# EAGLE board 1-Axis_Board_-_Camera_Gantry (EAGLE 6.4)
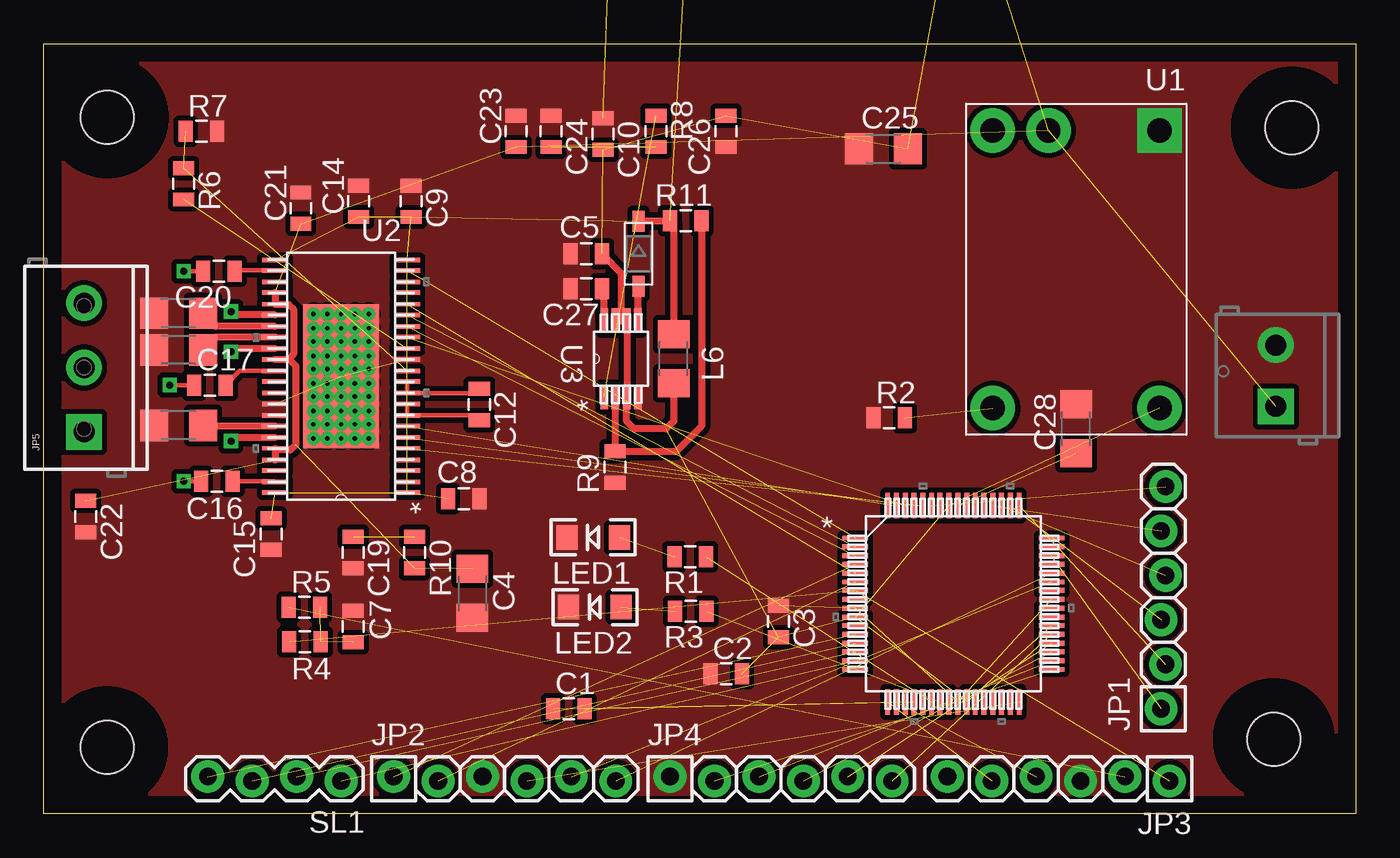
[diagram p0: board, top side]
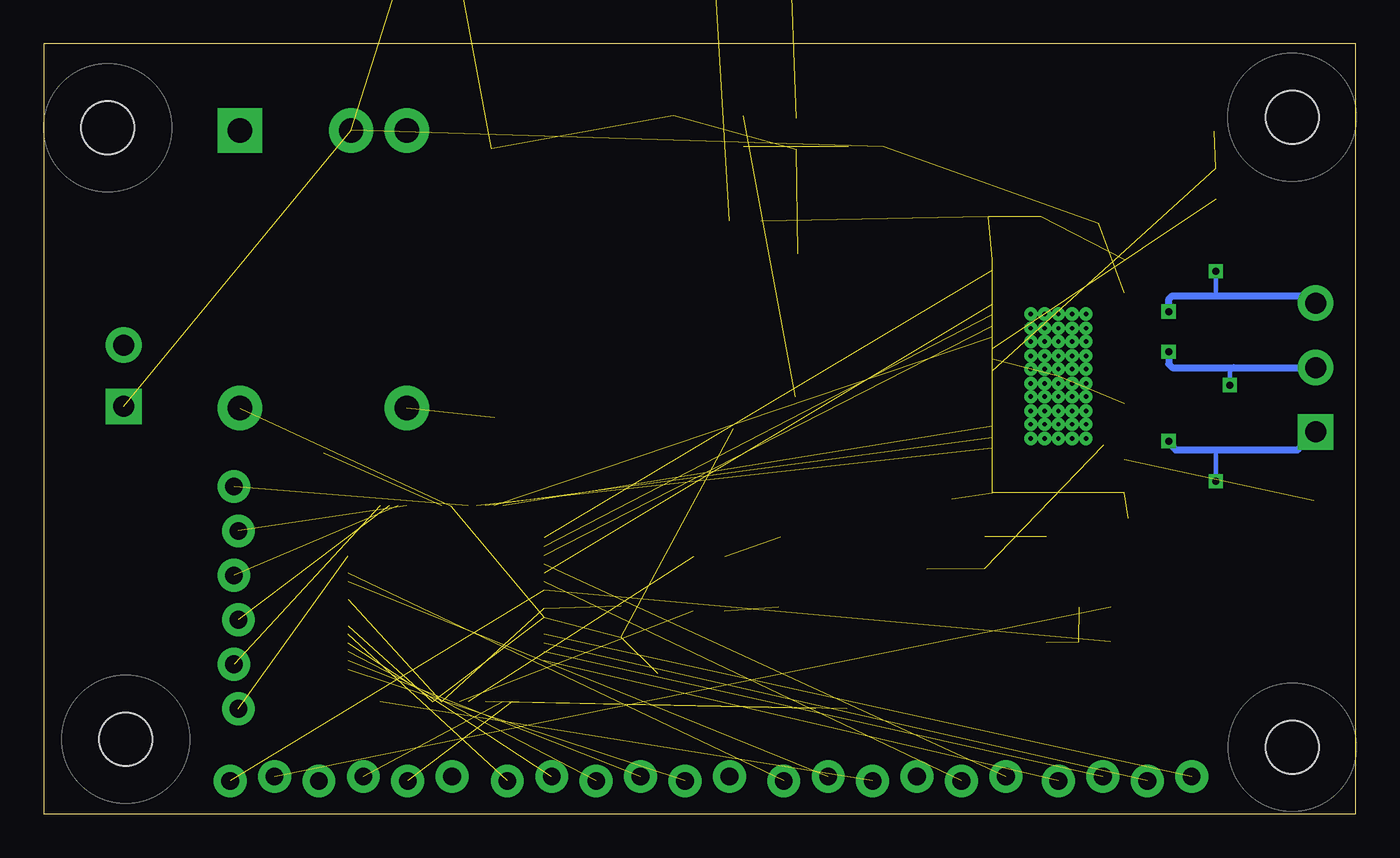
[diagram p1: board, bottom side, seen from below]

Size 75 x 44 mm. Coordinates in mm from the lower left corner, seen from the top.
Outline: 0,0 0,44 75,44 75,0 0,0
Copper layers (1*16): Top 0.035mm / dielectric 1.5mm / Bottom 0.035mm
Design rules "default": minimum track width 10mil, minimum drill 24mil, track to track 8mil, track to pad 8mil, pad to pad 8mil, via to via 8mil, smd to smd 8mil, copper to edge 40mil, drill to drill 8mil, minimum pad ring 10mil, minimum via ring 8mil, stop-mask expansion 4mil, vias tented up to drill 0mil, thermal gap 10mil
Net classes: 0 default: width 0.406 mm; 1 power: width 0.762 mm, clearance 0.254 mm to class 0, clearance 0.508 mm; 2 small: width 0.254 mm, clearance 0.254 mm to class 1

## Footprints (pad centres in the part's own frame; a part is rotated, then mirrored left to right if it is on the bottom)
0805 = smd 0.8 x 1.2: 1 -0.9,0; 2 0.9,0
1206 = smd 1.6 x 1.8: 1 -1.4,0; 2 1.4,0
CPOL-RADIAL-100UF-25V = drill 0.7 pad 1.651 square: 1 1.27,0 | drill 0.7 pad 1.651: 2 -1.27,0
CPOL-RADIAL-1000UF-25V = drill 0.7 pad 1.651 square: 1 2.54,0 | drill 0.7 pad 1.651: 2 -2.54,0
SOD-123 = smd 1.2 x 0.7: A 1.85,0; C -1.85,0
STAND-OFF-TIGHT = hole 3.048: 0,0
SCREWTERMINAL-3.5MM-2-NS = drill 1.2 pad 2.032 square: 1 0,0 | drill 1.2 pad 2.032: 2 3.5,0
1X06_LOCK = drill 1.016 pad 1.88: 1 0,0.127; 2 2.54,-0.127; 3 5.08,0.127; 4 7.62,-0.127; 5 10.16,0.127; 6 12.7,-0.127
SCREWTERMINAL-3.5MM-3_LOCK.007S = drill 1.2 pad 2.032 square: 1 -0.178,0 | drill 1.2 pad 2.032: 2 3.5,0; 3 7.178,0
LED-1206 = smd 1.2 x 1.4: A -1.5,0; C 1.5,0
1X04_LOCK = drill 1.016 pad 1.88: 1 0,0.127; 2 2.54,-0.127; 3 5.08,0.127; 4 7.62,-0.127
PTN78000 = drill 1.397 pad 2.54: ADJ 15.875,-9.525; INHIBIT 0,-9.525; V_IN 0,-6.35; V_OUT 15.875,0 | drill 1.397 pad 2.54 square: GND 0,0
DDW44_8P26X4P31 = smd 1.473 x 0.254: 1 -3.785,6.655; 2 -3.785,6.045; 3 -3.785,5.385; 4 -3.785,4.775; 5 -3.785,4.115; 6 -3.785,3.505; 7 -3.785,2.845; 8 -3.785,2.235; 9 -3.785,1.575; 10 -3.785,0.965; 11 -3.785,0.305; 12 -3.785,-0.305; 13 -3.785,-0.965; 14 -3.785,-1.575; 15 -3.785,-2.235; 16 -3.785,-2.845; 17 -3.785,-3.505; 18 -3.785,-4.115; 19 -3.785,-4.775; 20 -3.785,-5.385; 21 -3.785,-6.045; 22 -3.785,-6.655; 23 3.785,-6.655; 24 3.785,-6.045; 25 3.785,-5.385; 26 3.785,-4.775; 27 3.785,-4.115; 28 3.785,-3.505; 29 3.785,-2.845; 30 3.785,-2.235; 31 3.785,-1.575; 32 3.785,-0.965; 33 3.785,-0.305; 34 3.785,0.305; 35 3.785,0.965; 36 3.785,1.575; 37 3.785,2.235; 38 3.785,2.845; 39 3.785,3.505; 40 3.785,4.115; 41 3.785,4.775; 42 3.785,5.385; 43 3.785,6.045; 44 3.785,6.655 | smd 4.318 x 8.255: EPAD 0,0 | drill 0.254: V 1.575,3.556; V_2 -1.575,-2.743; V_3 -1.575,-3.556; V_4 -1.575,-1.981; V_5 -1.575,-1.168; V_6 -1.575,-0.406; V_7 -1.575,0.406; V_8 -1.575,1.168; V_9 -1.575,1.981; V_10 -1.575,2.743; V_11 -1.575,3.556; V_12 -0.787,-3.556; V_13 -0.787,-2.743; V_14 -0.787,-1.981; V_15 -0.787,-1.168; V_16 -0.787,-0.406; V_17 -0.787,0.406; V_18 -0.787,1.168; V_19 -0.787,1.981; V_20 -0.787,2.743; V_21 -0.787,3.556; V_22 0,-3.556; V_23 0,-2.743; V_24 0,-1.981; V_25 0,-1.168; V_26 0,-0.406; V_27 0,0.406; V_28 0,1.168; V_29 0,1.981; V_30 0,2.743; V_31 0,3.556; V_32 0.787,-3.556; V_33 0.787,-2.743; V_34 0.787,-1.981; V_35 0.787,-1.168; V_36 0.787,-0.406; V_37 0.787,0.406; V_38 0.787,1.168; V_39 0.787,1.981; V_40 0.787,2.743; V_41 0.787,3.556; V_42 1.575,-3.556; V_43 1.575,-2.743; V_44 1.575,-1.981; V_45 1.575,-1.168; V_46 1.575,-0.406; V_47 1.575,0.406; V_48 1.575,1.168; V_49 1.575,1.981; V_50 1.575,2.743
DGK8 = smd 1.422 x 0.432: 1 -2.184,0.965; 2 -2.184,0.33; 3 -2.184,-0.33; 4 -2.184,-0.965; 5 2.184,-0.965; 6 2.184,-0.33; 7 2.184,0.33; 8 2.184,0.965
QFP64-10X10MC = smd 1.473 x 0.279: 1 -5.613,3.759; 2 -5.613,3.251; 3 -5.613,2.743; 4 -5.613,2.261; 5 -5.613,1.753; 6 -5.613,1.245; 7 -5.613,0.762; 8 -5.613,0.254; 9 -5.613,-0.254; 10 -5.613,-0.762; 11 -5.613,-1.245; 12 -5.613,-1.753; 13 -5.613,-2.261; 14 -5.613,-2.743; 15 -5.613,-3.251; 16 -5.613,-3.759; 33 5.613,-3.759; 34 5.613,-3.251; 35 5.613,-2.743; 36 5.613,-2.261; 37 5.613,-1.753; 38 5.613,-1.245; 39 5.613,-0.762; 40 5.613,-0.254; 41 5.613,0.254; 42 5.613,0.762; 43 5.613,1.245; 44 5.613,1.753; 45 5.613,2.261; 46 5.613,2.743; 47 5.613,3.251; 48 5.613,3.759 | smd 0.279 x 1.473: 17 -3.759,-5.613; 18 -3.251,-5.613; 19 -2.743,-5.613; 20 -2.261,-5.613; 21 -1.753,-5.613; 22 -1.245,-5.613; 23 -0.762,-5.613; 24 -0.254,-5.613; 25 0.254,-5.613; 26 0.762,-5.613; 27 1.245,-5.613; 28 1.753,-5.613; 29 2.261,-5.613; 30 2.743,-5.613; 31 3.251,-5.613; 32 3.759,-5.613; 49 3.759,5.613; 50 3.251,5.613; 51 2.743,5.613; 52 2.261,5.613; 53 1.753,5.613; 54 1.245,5.613; 55 0.762,5.613; 56 0.254,5.613; 57 -0.254,5.613; 58 -0.762,5.613; 59 -1.245,5.613; 60 -1.753,5.613; 61 -2.261,5.613; 62 -2.743,5.613; 63 -3.251,5.613; 64 -3.759,5.613

## Placement (x,y rotation side)
C1  .1uF  [0805]  30,6 0 top
C2  .1uF  [0805]  39,8 0 top
C3  .1uF  [0805]  42,11 270 top
C4  2.2uF  [1206]  24.51,12.59 270 top
C5  .1uF  [0805]  31,32 180 top
C6  100uF  [CPOL-RADIAL-100UF-25V]  55.92,79.97 0 top  (outside the outline)
C7  .1uF  [0805]  17.69,10.7 90 top
C8  1uF  [0805]  24,18 180 top
C9  1uF  [0805]  21,35 270 top
C10  .1uF  [0805]  31.96,38.84 270 top
C11  330uF  [CPOL-RADIAL-1000UF-25V]  36,80 0 top  (outside the outline)
C12  100nF  [0805]  24.9,23.4 270 top
C13  47uF  [CPOL-RADIAL-1000UF-25V]  25,80 0 top  (outside the outline)
C14  1uF  [0805]  18,35 90 top
C15  1uF  [0805]  13,16 270 top
C16  .1uF  [0805]  9.9,19 0 top
C17  .1uF  [0805]  9.5,24.5 0 top
C18  1000uF  [CPOL-RADIAL-1000UF-25V]  46.96,79.98 180 top  (outside the outline)
C19  10nF  [0805]  17.67,14.92 270 top
C20  .1uF  [0805]  10,31 180 top
C21  .1uF  [0805]  14.7,34.6 90 top
C22  .1uF  [0805]  2.4,17 270 top
C23  .1uF  [0805]  27,39 90 top
C24  1.6nF  [0805]  29,39 270 top
C25  10uF 16V  [1206]  48,38 0 top
C26  1uF 16V  [0805]  39,39 270 top
C27  .1uF  [0805]  31,30 180 top
C28  10uF  [1206]  59,22 90 top
D5  PMEG2010AEH  [SOD-123]  34,32 270 top
E$1  [STAND-OFF-TIGHT]  71.34,39.2 0 top
E$2  [STAND-OFF-TIGHT]  70.32,4.26 0 top
E$3  [STAND-OFF-TIGHT]  3.62,3.8 0 top
E$4  [STAND-OFF-TIGHT]  3.64,39.8 0 top
J1  [SCREWTERMINAL-3.5MM-2-NS]  70.43,23.28 90 top
JP1  [1X06_LOCK]  64,6 90 top
JP2  [1X06_LOCK]  20,2 0 top
JP3  [1X06_LOCK]  64.35,2 180 top
JP4  [1X06_LOCK]  35.8,2 0 top
JP5  M03SCREW_LOCK  [SCREWTERMINAL-3.5MM-3_LOCK.007S]  2.3,22 90 top
L6  LQM31PN3R3M00L  [1206]  36,26 90 top
LED1  [LED-1206]  31.4,15.8 180 top
LED2  [LED-1206]  31.51,11.81 180 top
R1  330  [0805]  36.96,14.7 180 top
R2  383 - 242  [0805]  48.33,22.62 0 top
R3  330  [0805]  36.98,11.58 180 top
R4  470  [0805]  14.92,9.84 0 top
R5  10k  [0805]  14.9,11.8 0 top
R6  OC_ADJ  [0805]  8,36 270 top
R7  1  [0805]  9,39 0 top
R8  47k  [0805]  35,39 270 top
R9  18.2k  [0805]  32.65,19.82 270 top
R10  3.3Ohm  [0805]  21.2,14.93 270 top
R11  158k  [0805]  36.7,33.9 0 top
SL1  [1X04_LOCK]  17,2 180 top
U1  PTN78000  [PTN78000]  63.78,39.05 270 top
U2  DRV8312_DDW_44  [DDW44_8P26X4P31]  17,25 180 top
U3  TPS61085_DGK_8  [DGK8]  33,26 90 top
U$1  DSPIC33EP256MC506  [QFP64-10X10MC]  52,12 0 top
U$2  ERJ-8BWJR010V  [1206]  7.7,22.2 180 top
U$3  ERJ-8BWJR010V  [1206]  7.7,28.6 180 top
U$4  ERJ-8BWJR010V  [1206]  7.7,26.5 180 top

## Library data of the parts
C1-C3 C5-C28 E$1-E$4 J1 JP1 JP2 JP4 JP5 R6-R11 SL1 U1 = ASL
C4 JP3 R1-R5 = CMPE118lib
D5 L6 U$1-U$4 = DRV83x2Support
LED1 LED2 = CMPE118lib; COLOR: red
U2 = DRV83x2Support; DATASHEETURL: http://www.ti.com/lit/gpn/DRV8312; DESCRIPTION: 6.5A Three Phase Brushless DC Motor Driver with Inrush Protection (PWM Ctrl); FAMILY_NAME: 3-PHASE BRUSHLESS DRIVER; GENERIC_PART_NUMBER: DRV8312; INDUSTRY_STD_PKG_TYPE: HTSSOP; MANUFACTURER: Texas Instruments; MANUFACTURER_PART_NUMBER: drv8312_ddw_44; PACKAGE_DESIGNATOR: DDW; PIN_COUNT: 44; VENDOR: Texas Instruments
U3 = DRV83x2Support; DATASHEETURL: http://www.ti.com/lit/gpn/TPS61085; DESCRIPTION: 18.5V, 2A, 650kHz / 1.2MHz Step-Up DC-DC Converter w/ Forced PWM Mode; FAMILY_NAME: STEP-UP REGULATOR; GENERIC_PART_NUMBER: TPS61085; INDUSTRY_STD_PKG_TYPE: MSOP; MANUFACTURER: Texas Instruments; MANUFACTURER_PART_NUMBER: tps61085_dgk_8; PACKAGE_DESIGNATOR: DGK; PIN_COUNT: 8; VENDOR: Texas Instruments

## Nets
FAULT: U2.18 U$1.5
GND: C2.1 C3.1 C4.2 C5.2 C6.2 C7.2 C8.1 C9.1 C10.1 C11.2 C13.2 C14.2 C15.2 C18.2 C19.2 C21.2 C22.2 C23.2 C24.1 C25.1 C26.2 C27.2 C28.2 J1.2 JP2.3 JP3.3 JP4.1 LED1.C LED2.C R2.1 R7.2 R9.2 U1.GND U2.13 U2.36 U2.37 U2.EPAD U3.4 U$1.9 U$1.25 U$1.41 U$2.2 U$3.2 U$4.2
GVDD: C8.2 C9.2 C11.1 C13.1 C14.1 C15.1 D5.C L6.2 R11.1 U2.1 U2.2 U2.22 U2.23 U2.44
LED1: R1.1 U$1.22
LED2: R3.1 U$1.23
MCLR: JP3.1 R4.1 U$1.7
N$1: LED1.A R1.2
N$2: C7.1 R4.2 R5.2
N$3: LED2.A R3.2
N$4: U2.38 U$2.1
N$5: U2.29 U$3.1
N$6 [power]: R2.2 U1.ADJ
N$7: U2.30 U$4.1
N$8: C1.1 U$1.19
N$9: C1.2 U$1.20
N$10: C27.1 U3.8
N$11: R8.1 U3.1
N$12: C24.2 R8.2
N$13: C19.1 R10.1
N$14: C28.1 U$1.56
N$15: D5.A U3.5
N$16: R9.1 R11.2 U3.2
N$17: JP2.1 U$1.4
N$19: JP2.4 U$1.32
N$20: JP2.5 U$1.43
N$21: C16.2 U2.43
N$22: JP2.6 U$1.44
N$23: JP1.1 U$1.46
N$24: JP1.2 U$1.49
N$25: JP1.3 U$1.50
N$27: JP1.5 U$1.52
N$28: JP1.6 U$1.59
N$29: JP2.2 U$1.6
N$30: C17.2 U2.33
N$32: JP1.4 U$1.51
N$35: JP4.4 U$1.35
N$36: JP4.5 U$1.36
N$37: JP4.6 U$1.37
N$38: JP4.3 U$1.34
N$39: C20.1 U2.24
N$40: SL1.1 U$1.15
N$41: SL1.2 U$1.14
N$42: SL1.3 U$1.13
N$43: SL1.4 U$1.12
N$44: JP4.2 U$1.33
N$45: C12.2 R6.1 R7.1 U2.8 U2.9 U2.12
N$47: C12.1 U2.10 U2.11
OC_ADJ: R6.2 U2.14
OTW: U2.21 U$1.1
OUT_A: C20.2 JP5.3 U2.28
OUT_B: C17.1 JP5.2 U2.31
OUT_C: C16.1 JP5.1 U2.39
PGC: JP3.5 U$1.17
PGD [small]: JP3.4 U$1.18
PVDD [power]: C4.1 C18.1 C21.1 C22.1 C23.1 J1.1 R10.2 U1.V_IN U2.26 U2.27 U2.32 U2.40 U2.41
PWM_A: U2.17 U$1.2
PWM_B: U2.15 U$1.62
PWM_C: U2.5 U$1.60
RESET_A: U2.16 U$1.3
RESET_B: U2.7 U$1.63
RESET_C: U2.6 U$1.61
VCC: C2.2 C3.2 C5.1 C6.1 C10.2 C25.2 C26.1 L6.1 U1.V_OUT U3.3 U3.6 U3.7 U$1.10 U$1.26 U$1.38 U$1.57
VCC3V3: JP3.2 R5.1

## Tracks (layer width: path | path; a pad name or v marks a point on that pad's centre or on a via)
FAULT  (1 unrouted)
GND  (9 unrouted)
  pour Top (isolate 0.305, no thermals): 0,44 75,44 75,0 0,0
GVDD  (11 unrouted)
  Top 0.406: D5.C 35.75,33.85 R11.1 36,33.7 L6.2
LED1  (1 unrouted)
LED2  (1 unrouted)
MCLR  (2 unrouted)
N$1  (1 unrouted)
N$2  (2 unrouted)
N$3  (1 unrouted)
N$4
  Top 0.406: U2.38 9.14,22.16 U$2.1
N$5
  Top 0.406: U2.29 9.86,27.84 U$3.1
N$6  (1 unrouted)
N$7
  Top 0.406: U2.30 9.84,27.23 U$4.1
N$8  (1 unrouted)
N$9  (1 unrouted)
N$10
  Top 0.406: U3.8 32.03,29.86 C27.1
N$11  (1 unrouted)
N$12  (1 unrouted)
N$13  (1 unrouted)
N$14  (1 unrouted)
N$15
  Top 0.406: U3.5 33.97,30.11 D5.A
N$16
  Top 0.406: U3.2 32.67,20.75 R9.1 36.17,20.73 37.62,22.18 37.62,33.88 R11.2
N$17  (1 unrouted)
N$19  (1 unrouted)
N$20  (1 unrouted)
N$21
  Top 0.254: U2.43 13.17,19 C16.2
N$22  (1 unrouted)
N$23  (1 unrouted)
N$24  (1 unrouted)
N$25  (1 unrouted)
N$27  (1 unrouted)
N$28  (1 unrouted)
N$29  (1 unrouted)
N$30
  Top 0.254: U2.33 11.21,25.3 C17.2
N$32  (1 unrouted)
N$35  (1 unrouted)
N$36  (1 unrouted)
N$37  (1 unrouted)
N$38  (1 unrouted)
N$39
  Top 0.254: U2.24 10.95,31.05 C20.1
N$40  (1 unrouted)
N$41  (1 unrouted)
N$42  (1 unrouted)
N$43  (1 unrouted)
N$44  (1 unrouted)
N$45  (3 unrouted)
  Top 0.254: U2.9 U2.8 24.64,22.77 C12.2
N$47
  Top 0.254: C12.1 24.64,24.04 U2.10 U2.11
OC_ADJ  (1 unrouted)
OTW  (1 unrouted)
OUT_A  (via drill 0.4)
  Top 0.254: C20.2 v8,31
  Top 0.406: U2.28 10.89,28.5 v10.7,28.7
  Bottom 0.254: v8,31 8,29.6
  Bottom 0.406: v10.7,28.7 10.7,29.4 10.5,29.6 8,29.6 2.72,29.6 JP5.3
OUT_B  (via drill 0.4)
  Top 0.254: C17.1 v7.2,24.5
  Top 0.406: U2.31 10.88,26.57 v10.7,26.4
  Bottom 0.254: v7.2,24.5 7.2,25.3 7,25.5
  Bottom 0.406: v10.7,26.4 10.7,25.7 10.5,25.5 7,25.5 JP5.2
OUT_C  (via drill 0.4)
  Top 0.254: C16.1 v8,19
  Top 0.406: U2.39 10.79,21.5 v10.7,21.3
  Bottom 0.254: v8,19 8,20.8
  Bottom 0.406: v10.7,21.3 10.7,21.2 10.3,20.8 8,20.8 3.32,20.8 JP5.1
PGC  (1 unrouted)
PGD  (1 unrouted)
PVDD  (8 unrouted)
  Top 0.406: U2.26 U2.27 14,29.1 14.3,28.8 14.3,26.3 13.96,25.96 U2.32 14.04,25.96 14.4,25.6 14.4,21.1 14.1,20.8 13.3,20.8 U2.40 U2.41
PWM_A  (1 unrouted)
PWM_B  (1 unrouted)
PWM_C  (1 unrouted)
RESET_A  (1 unrouted)
RESET_B  (1 unrouted)
RESET_C  (1 unrouted)
VCC  (11 unrouted)
  Top 0.406: C5.1 33,30.9 33,28.7 33.33,28.37 U3.6 | U3.7 U3.6 | U3.6 33.02,28.5 32.9,28.5 32.9,28.4 33.33,27.97 U3.3 33.33,22.43 33.75,22 35.58,22 36,22.43 L6.1
VCC3V3  (1 unrouted)